# EAGLE board STorM32 NT imu v10 mini-mpu6000 (EAGLE 6.5.0)
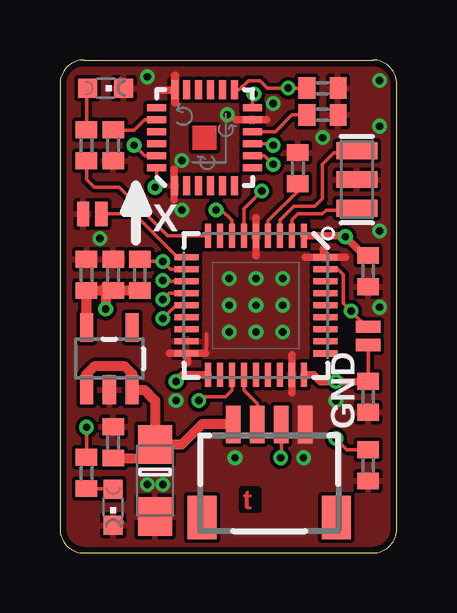
[diagram p0: board, top side]
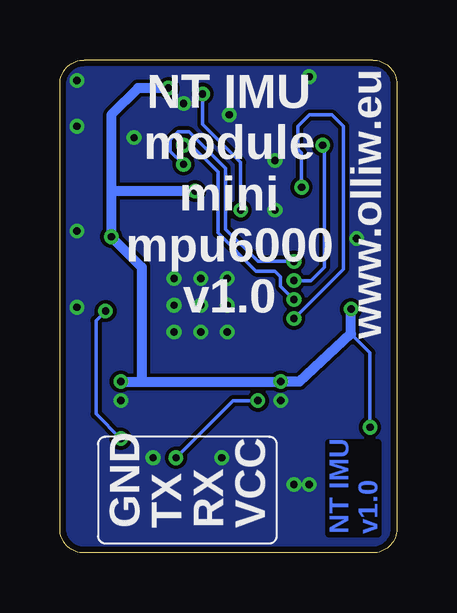
[diagram p1: board, bottom side, seen from below]

Size 14.05 x 20.54 mm. Coordinates in mm from the lower left corner, seen from the top.
Outline: 1,20.54 13.05,20.54 arc-90 14.05,19.54 14.05,1 arc-90 13.05,0 1,0 arc-90 0,1 0,19.54 arc-90 1,20.54
Copper layers (1*16): Top 0.035mm / dielectric 1.5mm / Bottom 0.035mm
Design rules "Fusion_eagle_rule_v1.1-shapes-supply-changed": minimum track width 6mil, minimum drill 12mil, track to track 6mil, track to pad 6mil, pad to pad 6mil, via to via 6mil, smd to smd 0mil, copper to edge 10mil, drill to drill 10mil, minimum pad ring 10mil, minimum via ring 6mil, stop-mask expansion 2mil, vias tented up to drill 100mil, thermal gap 6mil

## Footprints (pad centres in the part's own frame; a part is rotated, then mirrored left to right if it is on the bottom)
SMC_A = smd 1.6 x 1.4: + -1.5,0; - 1.5,0
C0402 = smd 0.7 x 0.9: 1 -0.65,0; 2 0.65,0
QFN-24 = smd 0.8 x 0.3: 1 -2,1.25; 2 -2,0.75; 3 -2,0.25; 4 -2,-0.25; 5 -2,-0.75; 6 -2,-1.25; 13 2,-1.25; 14 2,-0.75; 15 2,-0.25; 16 2,0.25; 17 2,0.75; 18 2,1.25 | smd 0.3 x 0.8: 7 -1.25,-2; 8 -0.75,-2; 9 -0.25,-2; 10 0.25,-2; 11 0.75,-2; 12 1.25,-2; 19 1.25,2; 20 0.75,2; 21 0.25,2; 22 -0.25,2; 23 -0.75,2; 24 -1.25,2
SOT23-5 = smd 0.55 x 1.2: 1 -0.95,-1.3; 2 0,-1.3; 3 0.95,-1.3; 4 0.95,1.3; 5 -0.95,1.3
CHIPLED_0603 = smd 0.8 x 0.8: A 0,-0.75; C 0,0.75
SM04B-SRSS-TB = smd 0.6 x 1.55: 1 -1.5,2.975; 2 -0.5,2.975; 3 0.5,2.975; 4 1.5,2.975 | smd 1.2 x 1.8: FIT@1 -2.8,-0.9; FIT@2 2.8,-0.9
R0402 = smd 0.7 x 0.9: 1 -0.65,0; 2 0.65,0
SJ_2S-NO = smd 0.508 x 1.016: 1 -0.381,0; 2 0.381,0
VFQFPN36 = smd 1 x 0.25: 1 -2.9,2; 2 -2.9,1.5; 3 -2.9,1; 4 -2.9,0.5; 5 -2.9,0; 6 -2.9,-0.5; 7 -2.9,-1; 8 -2.9,-1.5; 9 -2.9,-2; 19 2.9,-2; 20 2.9,-1.5; 21 2.9,-1; 22 2.9,-0.5; 23 2.9,0; 24 2.9,0.5; 25 2.9,1; 26 2.9,1.5; 27 2.9,2 | smd 0.25 x 1: 10 -2,-2.9; 11 -1.5,-2.9; 12 -1,-2.9; 13 -0.5,-2.9; 14 0,-2.9; 15 0.5,-2.9; 16 1,-2.9; 17 1.5,-2.9; 18 2,-2.9; 29 1.5,2.9; 30 1,2.9; 31 0.5,2.9; 32 0,2.9; 33 -0.5,2.9; 34 -1,2.9; 35 -1.5,2.9; 36 -2,2.9 | smd 0.27 x 1: 28 2,2.9
RESONATOR-SMD = smd 0.7 x 1.7: 1 -1.2,0; 2 0,0; 3 1.2,0

## Placement (x,y rotation side)
C1  10u/6.3V  [SMC_A]  3.97,3.02 270 top
C2  100n  [C0402]  2.22,4.6 90 top
C3  100n  [C0402]  10.95,19.37 0 top
C5  2.2n  [C0402]  2.22,16.99 270 top
C6  100n  [C0402]  10.95,18.26 0 top
C7  1u  [C0402]  1.11,11.59 90 top
C8  100n  [C0402]  9.92,16.03 90 top
C9  100n  [C0402]  12.86,6.51 270 top
C10  100n  [C0402]  2.22,11.59 90 top
C11  100n  [C0402]  12.86,11.75 270 top
IC1  MPU6000  [QFN-24]  6.03,17.3 90 top
IC2  [SOT23-5]  2.06,8.1 0 top
LED1  red  [CHIPLED_0603]  2.22,1.91 180 top
LED2  green  [CHIPLED_0603]  1.91,19.37 270 top
NTX  NTX  [SM04B-SRSS-TB]  8.73,2.38 0 top
R1  4.7k  [R0402]  1.11,3.33 270 top
R5  10k  [R0402]  3.33,11.59 270 top
R6  2.2k  [R0402]  1.11,16.99 90 top
R7  10k  [R0402]  12.86,3.65 90 top
SJ2  BOOT0  [SJ_2S-NO]  12.86,9.05 90 top
SJ3  IMU-ID  [SJ_2S-NO]  1.35,14.13 0 top
U1  STM32F10XTXU6  [VFQFPN36]  8.18,10.32 270 top
Y1  RESONATORSMD  [RESONATOR-SMD]  12.38,15.56 90 top

## Library data of the parts
C1-C3 C5-C11 R1 R5-R7 = rcl
IC1 IC2 SJ2 SJ3 Y1 = # SparkFun2
LED1 LED2 = led
NTX = con-jst2
U1 = # stm32

## Nets
3.3V: C3.1 C7.1 C9.1 C10.1 C11.1 IC1.13 IC2.5 R1.1 R5.2 SJ2.1 U1.1 U1.6 U1.19 U1.27
5V: C1.+ C2.1 IC2.1 IC2.3 NTX.1
ADC1: U1.8
CANRX: U1.23
CANTX: U1.24
CS: IC1.8 R5.1 U1.11
GND: C1.- C2.2 C3.2 C5.2 C6.2 C7.2 C8.2 C9.2 C10.2 C11.2 IC1.1 IC1.11 IC1.18 IC2.2 LED1.C LED2.C NTX.4 R7.1 SJ3.1 U1.5 U1.17 U1.18 U1.26 U1.36 Y1.2
INT: IC1.12 U1.7
LED: R6.1 U1.9
N$1: C8.1 U1.4
N$2: LED2.A R6.2
N$3: R7.2 SJ2.2 U1.35
N$5: U1.2 Y1.1
N$6: U1.3 Y1.3
N$9: LED1.A R1.2
N$20: C6.1 IC1.10
N$24: C5.1 IC1.20
RX: NTX.2 U1.22
RX2: SJ3.2 U1.10
SCL: IC1.23 U1.12
SDA: IC1.24 U1.14
SDO: IC1.9 U1.13
SWCLK: U1.28
SWDIO: U1.25
T1CH1: U1.20
TX: NTX.3 U1.21

## Tracks (layer width: path | path; a pad name or v marks a point on that pad's centre or on a via)
3.3V  (via drill 0.3)
  Top 0.152: IC2.5 1.11,9.56 | 13,7.14 C9.1 SJ2.1 | R5.2 1.91,11.11 | 11.86,13.22 v11.91,13.18 | C3.1 v9.53,19.37 8.65,19.37 8.33,19.68 7.86,19.68 7.48,19.3 IC1.13 | U1.6 7.68,14.34 v8.41,15.08 | R1.1 v1.11,5.24
  Top 0.305: U1.27 10.6,7.42 10.87,7.14 v11.51,7.14 13,7.14 | v4.84,7.14 5.12,7.42 U1.19 | C11.1 12.69,12.4 v11.91,13.18 | U1.1 11.86,13.22
  Top 0.406: 1.11,9.56 C7.1 C10.1 R5.2 | 1.91,11.11 v1.91,10.16
  Bottom 0.152: v1.11,5.24 1.11,8.33 1.91,9.13
  Bottom 0.406: v11.51,7.14 10.64,7.14 | 10.64,7.14 v4.84,7.14 4.05,7.14 1.91,9.13 v1.91,10.16 | v9.53,19.37 10.79,19.37 11.91,18.26 11.91,15.08 | 11.91,15.08 v11.91,13.18 10.64,11.91 10.64,7.14 | v8.41,15.08 11.91,15.08
5V
  Top 0.152: 3.41,3.95 C1.+
  Top 0.406: NTX.1 5.92,5.36 5.08,4.52 C1.+ 3.97,6.35 3.52,6.8 IC2.3 3.01,7.46 2.7,7.78 1.43,7.78 1.11,7.46 IC2.1 | C2.1 3.41,3.95
CS  (via drill 0.3)
  Top 0.152: U1.11 4.61,11.82 v4.29,12.14 3.4,12.14 R5.1 | IC1.8 8.53,16.55 v8.89,16.19
  Bottom 0.152: v4.29,12.14 5.79,12.14 7.14,13.49 7.14,16.03 8.65,17.54 9.13,17.54 9.45,17.22 9.45,16.75 v8.89,16.19
GND  (via drill 0.3 pad 0.61)
  Top 0.152: 6.07,8.32 6.11,8.68 6.11,9.13 | IC1.11 7.39,18.05 7.62,18.06 | 10.99,12.38 11.06,12.64 U1.36 | 5.4,8.32 5.2,8.24 U1.18 5.36,8.3 5.32,7.94 | 4.76,19.29 4.76,18.81 4.8,18.77
  Top 0.305: 8.18,13.97 8.18,12.38 | 11.91,12.31 10.24,12.31 | 4.56,8.32 5.4,8.32 6.07,8.32 | 4.76,15.99 4.76,14.72 | 7.34,18.06 7.62,18.06 8.61,18.06 | 4.17,19.29 4.76,19.29 | 10.99,12.38 10.99,12.66 | 5.32,8.26 5.32,7.94 | 9.68,8.26 9.68,6.67
  Top 0.356: 4.8,18.77 4.8,19.88
  other vias: 7.06,10.32 9.29,10.32 8.18,10.32 7.06,9.21 8.18,9.21 9.29,9.21 5.08,16.35 6.99,18.26 10.16,3.97 7.3,3.97 7.06,11.43 8.18,11.43 9.29,11.43 4.84,6.35 11.51,6.35 1.67,13.1 3.65,19.84 13.34,17.78 10.95,17.3 8.89,18.73 13.34,13.41 13.34,10.24 3.65,2.86 4.29,2.86 13.34,19.68 5.08,14.29
  pour Bottom (isolate 0.152): 0.33,19.54 arc-90 1,20.21 13.05,20.21 arc-90 13.72,19.54 13.72,1 arc-90 13.05,0.33 1,0.33 arc-90 0.33,1
  pour Top (isolate 0.152): 0.33,19.54 arc-90 1,20.21 13.05,20.21 arc-90 13.72,19.54 13.72,1 arc-90 13.05,0.33 1,0.33 arc-90 0.33,1
  pour Top (no thermals): 9.76,6.35 10.87,6.35 10.87,4.13 9.76,4.13
INT  (via drill 0.3)
  Top 0.152: U1.7 7.18,13.86 6.75,14.29 v6.51,14.29 | v8.1,19.13 8.03,19.07 IC1.12
  Bottom 0.152: v6.51,14.29 6.51,16.27 8.1,17.86 v8.1,19.13
LED
  Top 0.152: U1.9 4.48,13.22 2.46,15.24 1.43,15.24 1.11,15.56 R6.1
N$1
  Top 0.152: U1.4 8.68,13.84 9.92,15.08 C8.1
N$2
  Top 0.152: R6.2 1.11,19.57 LED2.A
N$3  (via drill 0.3)
  Top 0.152: U1.35 11.6,11.82 11.83,11.59 11.83,10.4 v12.14,10.08 12.86,9.37 SJ2.2 | 12.84,4.45 R7.2 11.97,4.3 v11.51,4.76
  Bottom 0.152: v12.14,10.08 12.54,9.68 12.54,5.79 v11.51,4.76
N$5
  Top 0.152: U1.2 9.68,13.88 9.92,14.13 10.95,14.13 11.11,14.29 12.31,14.29 Y1.1
N$6
  Top 0.152: U1.3 9.18,13.86 9.76,14.45 10.64,14.45 10.95,14.76 10.95,16.19 11.43,16.67 12.29,16.67 Y1.3
N$9
  Top 0.152: R1.2 2.19,2.68 LED1.A
N$20
  Top 0.152: IC1.10 8.98,17.55 9.68,18.26 C6.1
N$24
  Top 0.152: IC1.20 3.53,18.05 3.1,17.62 2.24,17.62 C5.1
RX
  Top 0.152: U1.22 7.68,6.77 8.23,6.21 NTX.2
RX2
  Top 0.152: U1.10 4.91,12.32 3.1,14.13 SJ3.2
SCL  (via drill 0.3)
  Top 0.152: v4.29,11.35 4.33,11.32 U1.12 | IC1.23 3.53,16.55 v3.1,16.99
  Bottom 0.152: v4.29,11.35 3.57,11.35 3.02,11.91 3.02,16.91 v3.1,16.99
SDA  (via drill 0.3)
  Top 0.152: IC1.24 4.03,15.3 v3.97,15.24 | v4.29,9.76 4.84,10.32 U1.14
  Bottom 0.152: v4.29,9.76 2.22,11.83 2.22,17.78 2.7,18.26 3.65,18.26 4.13,17.78 4.13,16.83 3.97,16.67 v3.97,15.24
SDO  (via drill 0.3)
  Top 0.152: U1.13 4.55,10.82 v4.29,10.56 | v8.89,16.99 8.82,17.05 IC1.9
  Bottom 0.152: v8.89,16.99 8.57,16.99 7.46,15.88 7.46,13.34 5.87,11.75 5.08,11.75 4.84,11.51 4.84,11.11 v4.29,10.56
TX  (via drill 0.3)
  Top 0.152: v9.21,3.97 9.23,3.99 NTX.3 | U1.21 7.18,6.78 6.91,6.51 5.95,6.51 v5.79,6.35
  Bottom 0.152: v5.79,6.35 6.83,6.35 v9.21,3.97

## Text on the board
Top: t
Bottom: NT IMU / v1.0
tNames: X | GND
bNames: www.olliw.eu | NT IMU / module / mini / mpu6000 / v1.0 | VCC | RX | TX | GND